# Altium PCB PSU.PcbDoc
Units mm, origin at the board's own origin, x right, y up, seen from the top; angles counter-clockwise.
Board outline 49 x 29 mm, 2 copper layers (Top Layer, Bottom Layer); 11 components, 7 nets, 34 pads, 0 vias.
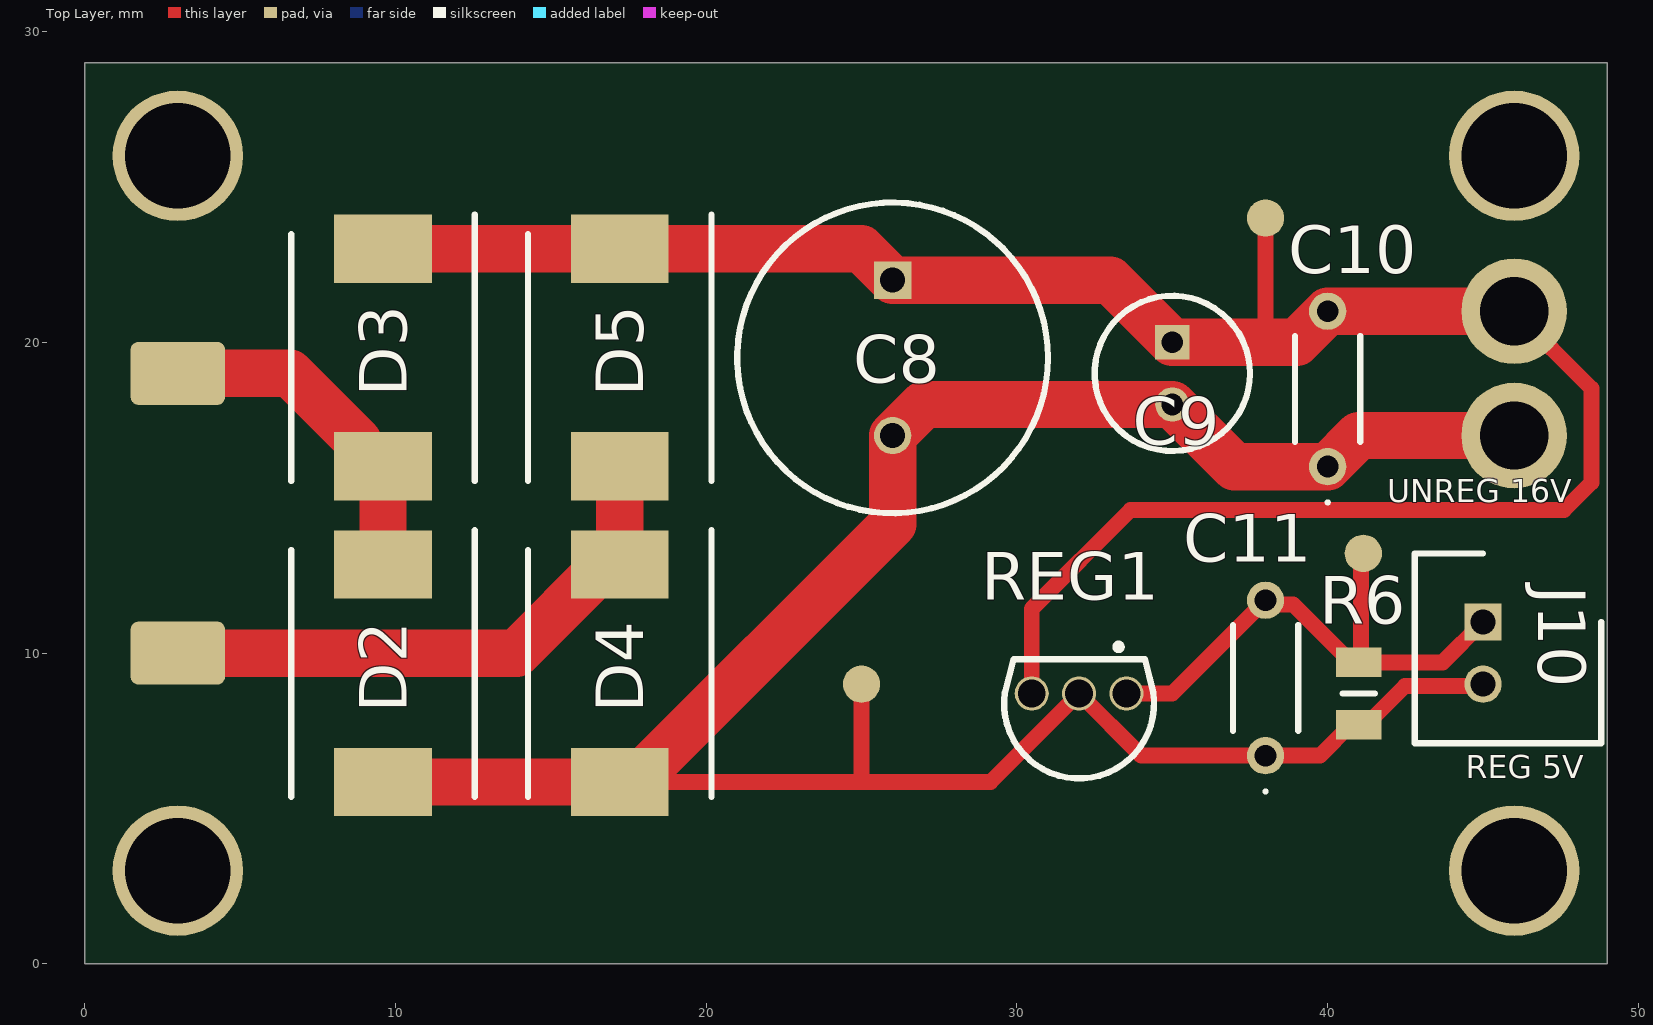
[diagram p0: Top Layer view]
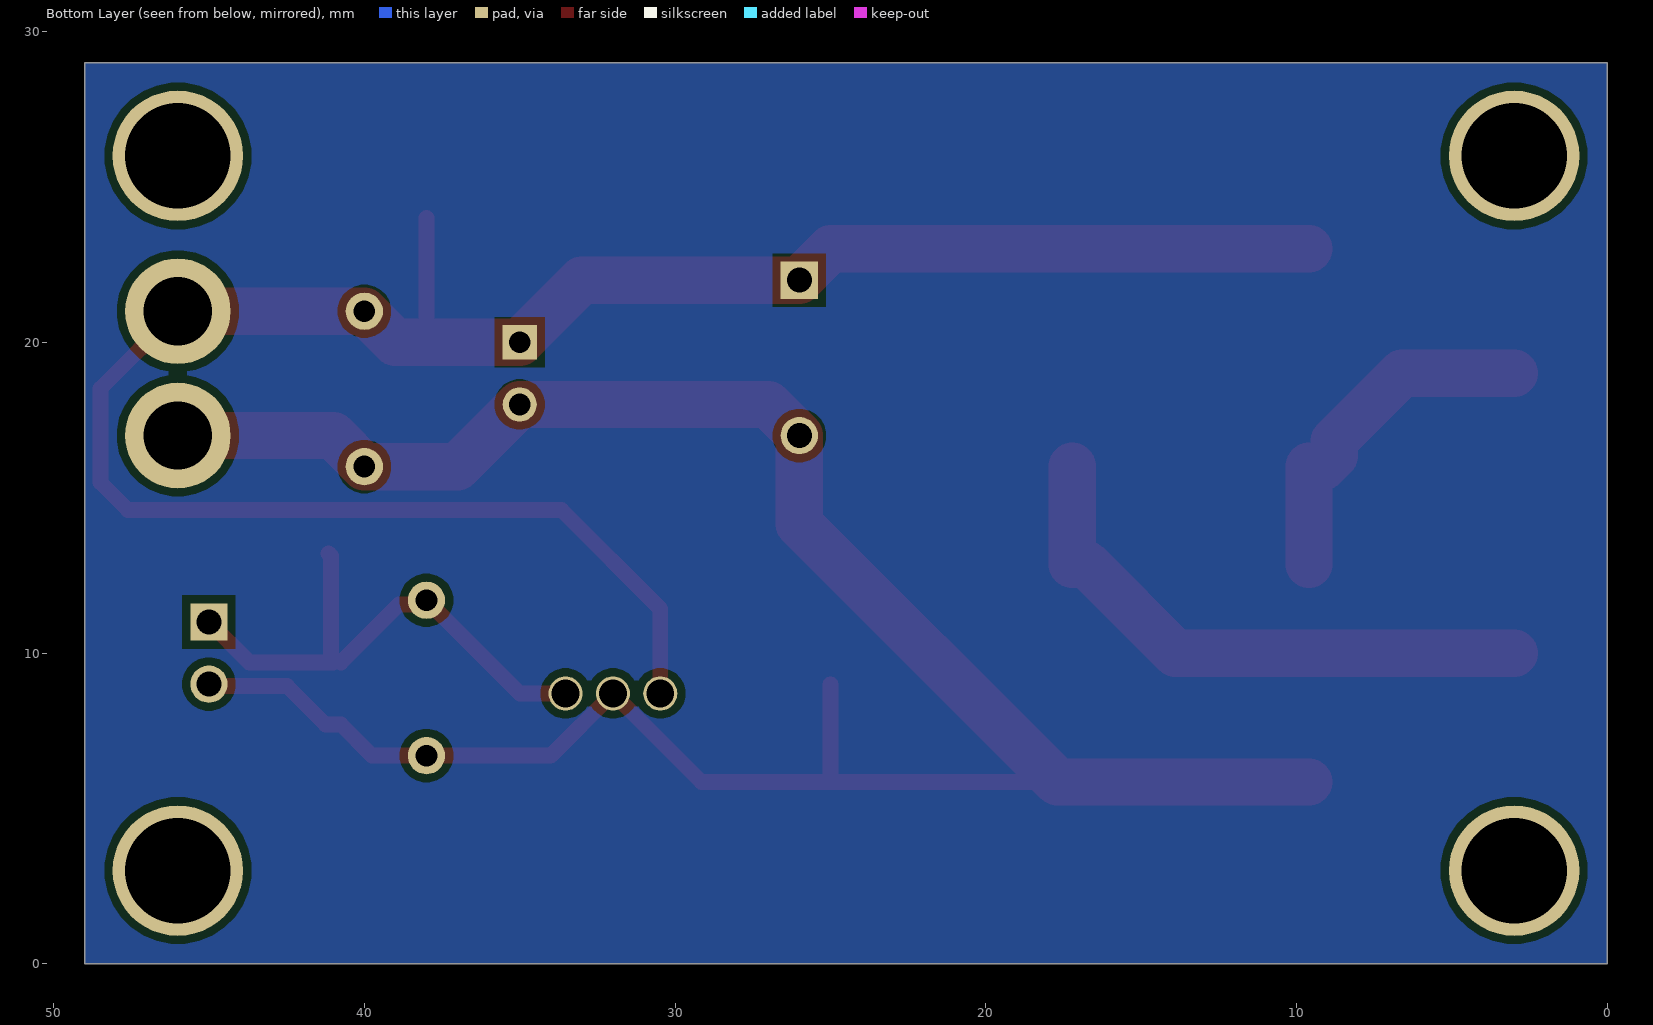
[diagram p1: Bottom Layer view, seen from below]
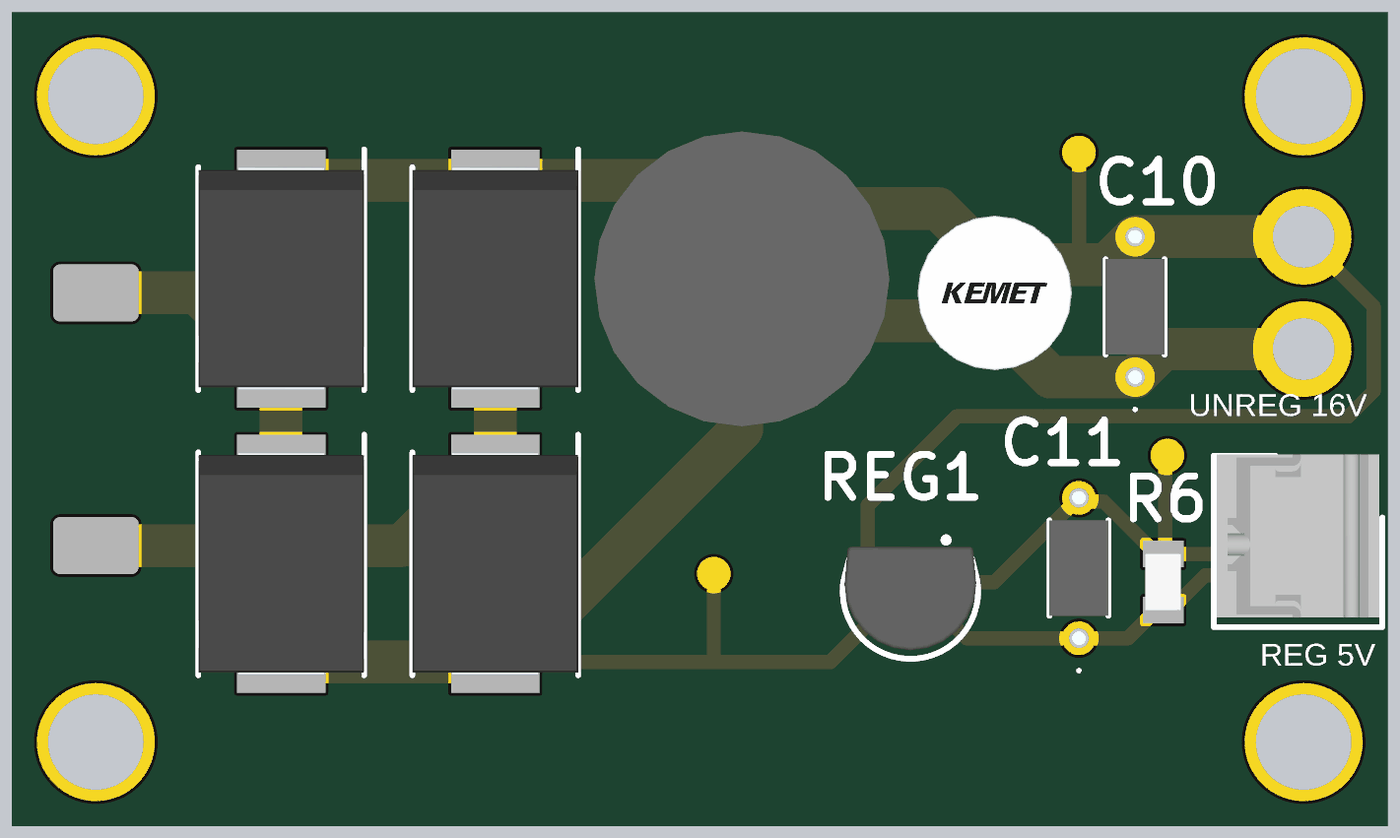
[diagram p2: 3D render of the assembled board from above, using the file's embedded part models]

## Layer stack, top to bottom
Top Solder: solder mask 0.0102, Solder Resist, Dk 3.5
Top Layer: signal copper 0.0356
Dielectric 1: dielectric 0.32, FR-4, Dk 4.8
Bottom Layer: signal copper 0.0356
Bottom Solder: solder mask 0.0102, Solder Resist, Dk 3.5

## Board outline
0,0 49,0 49,29 0,29

## Design rules (kind name [scope] priority, off if disabled: settings)
Clearance [All] p1: gap=0.254 ignorepadtopadclearanceinfootprint=FALSE
PolygonConnect [All] p1: connectstyle=Relief reliefconductorwidth=0.254 reliefentries=4 polygonreliefangle="90 Angle" airgapwidth=0.254
RoutingVias [All] p1: holewidth=0.711 width=1.27 viastyle="Through Hole" minholewidth=0.711 minwidth=1.27 maxholewidth=0.711 maxwidth=1.27
SolderMaskExpansion [All] p1: expansion=0.102 istentingtop=FALSE
Width [All] p1: maxlimit=1.524 minlimit=0.127 preferedwidth=0.254 minimp=50.000000 maximp=50.000000 favimp=50.000000
30 further rules are at their usual default settings.

## Components (designator, comment, footprint, x,y, rotation, side; value= is the part's Value field where it differs from the comment)
C8 "1000uF" CAP_RAD_10x20mm_ELC 26,22 r270 top
C9 "100uF" CAP_RAD_ELC_5x11mm 35,20 r270 top
C10 "1uF" CAP_RAD_MLCC 40,16 r90 top
C11 "1uF" CAP_RAD_MLCC 38,6.7 r90 top
D2 "D_Diode_SMC4" DIO_S8KS-E3/I_MED 9.6,9.35 r270 top
D3 "D_Diode_SMC4" DIO_S8KS-E3/I_MED 9.6,19.51 r270 top
D4 "D_Diode_SMC4" DIO_S8KS-E3/I_MED 17.22,9.35 r270 top
D5 "D_Diode_SMC4" DIO_S8KS-E3/I_MED 17.22,19.51 r270 top
J10 "CON_F1x2Pin" CON_M1x2PIN_SHROUDED 45,11 r90 top
R6 "100K" RES_0805US_MED 41,8.7 r90 top
REG1 "LM7805CT" IC_5V_REGULATOR 33.27,8.7 r180 top

## Footprints (in the part's own frame and the unit in brackets; to place one, negate y for a bottom-side part, rotate by r counter-clockwise, add the part's x,y. Pads: shape width x height; smd on the part's side, far side on the other; paste and mask are expansions set on the pad)
CAP_RAD_10x20mm_ELC [mm]
  rect 1.2x1.2 hole 0.8: 1(0,0)
  round 1.2 hole 0.8: 2(5,0)
  silkscreen extent -2.5,-5 7.5,5, body extent -2.75,-5.24 7.75,5.24, height 21.5
CAP_RAD_ELC_5x11mm [mm] "ESK107M025AC3AA 5mm"
  rect 1.1x1.1 hole 0.7: 1(0,0)
  round 1.1 hole 0.7: 2(2,0)
  silkscreen extent -1.5,-2.5 3.5,2.5, body extent -1.74,-2.75 3.74,2.75, height 12.51
CAP_RAD_MLCC [mm] "K102J15C0GF53H5G Radial mounted MLCC"
  round 1.2 hole 0.7: 1(0,0) 2(5,0)
  silkscreen extent -1.2,-1.05 4.2,1.05, body extent -0.25,-1.05 5.25,1.05, height 6.5
CON_M1x2PIN_SHROUDED [mm]
  rect 1.2x1.2 hole 0.8: 1(0,0)
  round 1.2 hole 0.8: 2(-2,0)
  silkscreen extent -3.9,-3.8 2.2,2.2, body extent -3.56,-3.7 2.24,2.1, height 7.31
DIO_S8KS-E3/I_MED [mm]
  rect 2.2x3.15 smd: 1(-3.5,0) 2(3.5,0)
  silkscreen extent -4.6,-2.95 3.97,2.95, body extent -3.97,-2.95 3.97,2.95, height 2.62
IC_5V_REGULATOR [mm] "L78L05ACZ-AP / 7Vmin 30Vmax 100mA"
  round 1.1 hole 0.89: 1(-0.254,0) 2(1.27,0) 3(2.794,0)
  silkscreen extent -1.14,-1.6 3.68,2.73, body extent -1.08,-1.27 3.62,2.43, height 4.36
RES_0805US_MED [mm]
  rect 0.95x1.45 smd: 1(-1,0) 2(1,0)
  silkscreen extent 0,-0.52 0,0.52, body extent -1,-0.62 1,0.63, height 0.45

## Part data
C8 C9: library part D_Capacitor_Rad_ELC, "Electrolothic radial mount Capacitor Polarised", Manufacturer_Name="Wurth Elektronik", Manufacturer_Part_Number=860020475018, Mouser Part Number=710-860020475018, Datasheet Link=https://ms.componentsearchengine.com/Datasheets/2/860020475018.pdf, Height=21.5mm, Mouser Price/Stock=https://www.mouser.co.uk/ProductDetail/Wurth-Elektronik/860020475018?qs=0KOYDY2FL29%2F2GIHZNCdMQ%3D%3D
C10 C11: library part D_Capacitor_RAD_MLCC
D2 D3 D4 D5: "General purpose SMC-4 diode", Manufacturer_Name=Vishay, Manufacturer_Part_Number=S8KS-E3/I, Mouser Part Number=78-S8KS-E3/I, Datasheet Link=https://www.vishay.com/docs/98461/s8gs_s8js_s8ks_s8ms.pdf, Height=2.62mm, Mouser Price/Stock=https://www.mouser.co.uk/ProductDetail/Vishay-General-Semiconductor/S8KS-E3-I?qs=ulEaXIWI0c%252BEdM%252B9aITJZQ%3D%3D
J10: "Connector", Arrow Part Number=SMC-1-02-1-GT, Manufacturer_Name="Adam Tech", Arrow Price/Stock=https://www.arrow.com/en/products/smc-1-02-1-gt/adam-tech, Datasheet Link=https://app.adam-tech.com/products/download/data_sheet/203379/smc-1-xx-1-gt-data-sheet.pdf, Height=4.381mm, Manufacturer_Part_Number=SMC-1-02-1-GT
R6: library part D_Resistor_TF0805, "SMD 0603 Thick Film 4.7kΩ 5.00% 0.1W", Case Code (Imperial)=0603, Case Code (Metric)=1608, Max Operating Temperature=155°C, Max Power Dissipation=100mW, Min Operating Temperature=-55°C, Ratings=AEC-Q200, Resistance=4.7kR, Resistor Type="Thick Film", Temperature Coefficient=100ppm/°C, Tolerance=5%, Voltage Rating=50V, Case/Package=0603, Features="Moisture Resistant", Height=0.45mm, Lead Free="Lead Free", Length=1.6mm, Number of Terminations=2, Packaging="Tape and Reel", Power Rating=100mW, RoHS Compliant=Yes, Series=AC, Termination=SMD/SMT, Weight=7.1E-05oz, Width=0.8mm
REG1: library part IC_Regulator, "Non adjustable SC voltage reg 3pin"

## Free pads (board coordinates)
  round 3.4 / inner round 4.2 / far side round 3.4 hole 2.2: 1(46,17) 1(46,21)
  rrect25% 3.048x2.032 smd: 2(3,19) 3(3,10)
  round 1.2 smd paste-2539.97: 4(25,9) 5(38,24) 6(41.148,13.208)
  round 4.2 hole 3.4: g(3,3) g(3,26) g(46,3) g(46,26)

## Nets (pads, with @x,y where several pads share a name; then routed paths per layer and width w, separated by ;. In a path a pad name is that pad's centre, name@x,y a point inside that pad or via, vN(x,y) a via of type N, cw(c..) or ccw(c..) an arc to the next point about the centre after c; other vN are vias at no path point)
NetC8_1: C8.1 C9.1 C10.2 D3.1 D5.1 pad.1@46,21 pad.5 REG1.3 | length 70.6
  Top Layer w0.508: REG1.3 30.476,11.426 33.655,14.605 47.605,14.605 48.487,15.487 48.487,18.513 pad.1@46,21 ; pad.5 38,20.1 38.1,20
  Top Layer w1.524: D3.1 D5.1 24.99,23.01 C8.1 33,22 C9.1 38.1,20 39,20 C10.2 pad.1@45.5,21
NetC8_2: C8.2 C9.2 C10.1 C11.1 D2.2 D4.2 J10.2 pad.1@46,17 pad.4 R6.1 REG1.2 | length 78.2
  Top Layer w0.508: D4.2@17.695,5.85 24.892,5.85 ; pad.4 25,5.958 24.892,5.85 ; J10.2 44.938,8.938 42.488,8.938 41.25,7.7 R6.1 40.75,7.7 39.75,6.7 C11.1 34,6.7 REG1.2 29.15,5.85 24.892,5.85
  Top Layer w1.524: D2.2 D4.2 17.695,5.85 26,14.155 C8.2 27,18 C9.2 37,16 C10.1 41,17 pad.1@46.39,17
NetC11_2: C11.2 J10.1 pad.6 R6.2 REG1.1 | length 17.4
  Top Layer w0.508: REG1.1 35,8.7 C11.2 38.132,11.568 38.882,11.568 R6.2@40.75,9.7 ; pad.6 41.074,13.134 41.074,9.774 R6.2 43.7,9.7 J10.1
NetD2_1: D2.1 D3.2 pad.2 | length 11.3
  Top Layer w1.524: pad.2 6.61,19 8.787,16.823 8.787,16.348 9.125,16.01 D3.2 D2.1
NetD4_1: D4.1 D5.2 pad.3 | length 18.6
  Top Layer w1.524: pad.3 13.895,10 16.745,12.85 D4.1 D5.2
NetReceptor_0: 
NetReceptor_+: 

## Polygon pours and split planes (outlines as drawn)
no net on Bottom Layer "NONET_L02_P000" (solid, pour order 0): 0,29 49,29 49,0 0,0 0,22 0,24

## Silkscreen, mask and mechanical layers (free items; w line width, h text height)
Top Overlay:
  text "UNREG 16V" at 41.91,14.618 h1.27
  text "REG 5V" at 44.45,5.728 h1.27